# Altium PCB PCB1.PcbDoc
Units mm, origin at the board's own origin, x right, y up, seen from the top; angles counter-clockwise.
Board outline 35.94 x 49.66 mm, 2 copper layers (Top Layer, Bottom Layer); 28 components, 16 nets, 79 pads, 7 vias.
Unrouted connection lines stored in the file: 1.
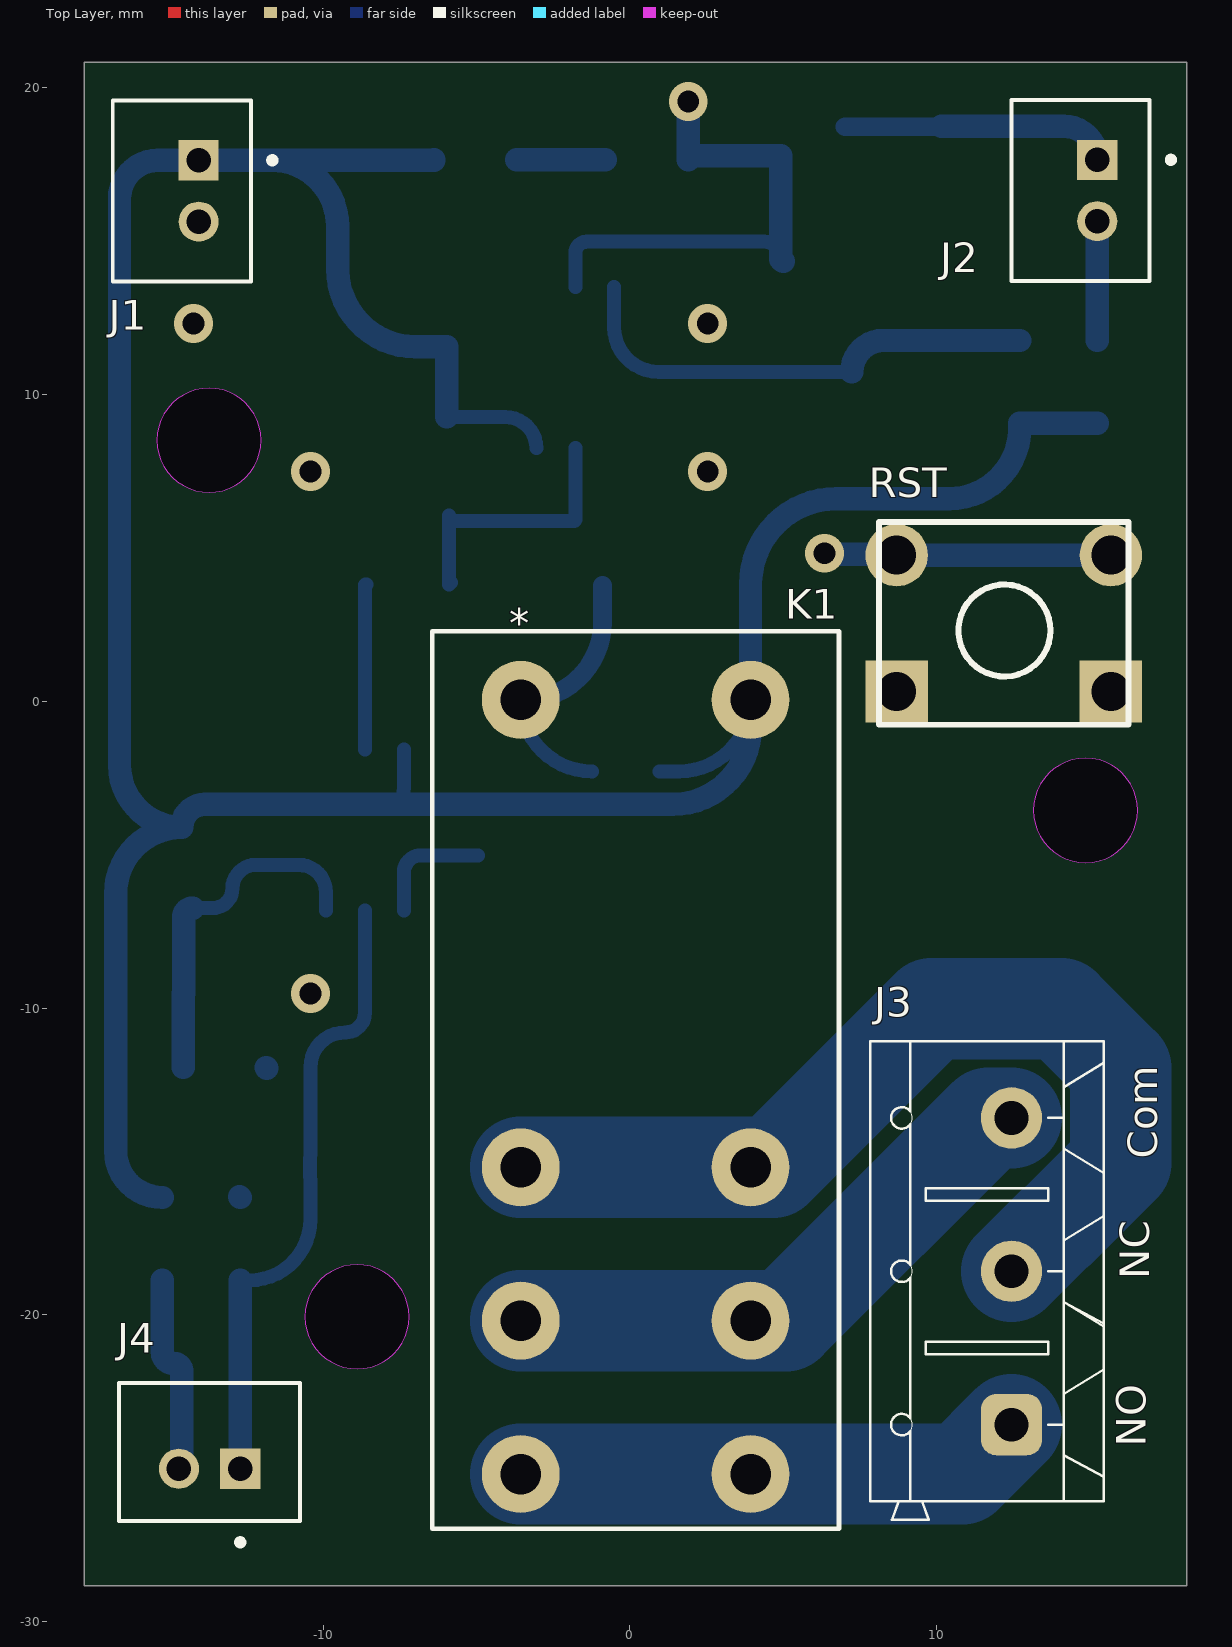
[diagram p0: Top Layer view]
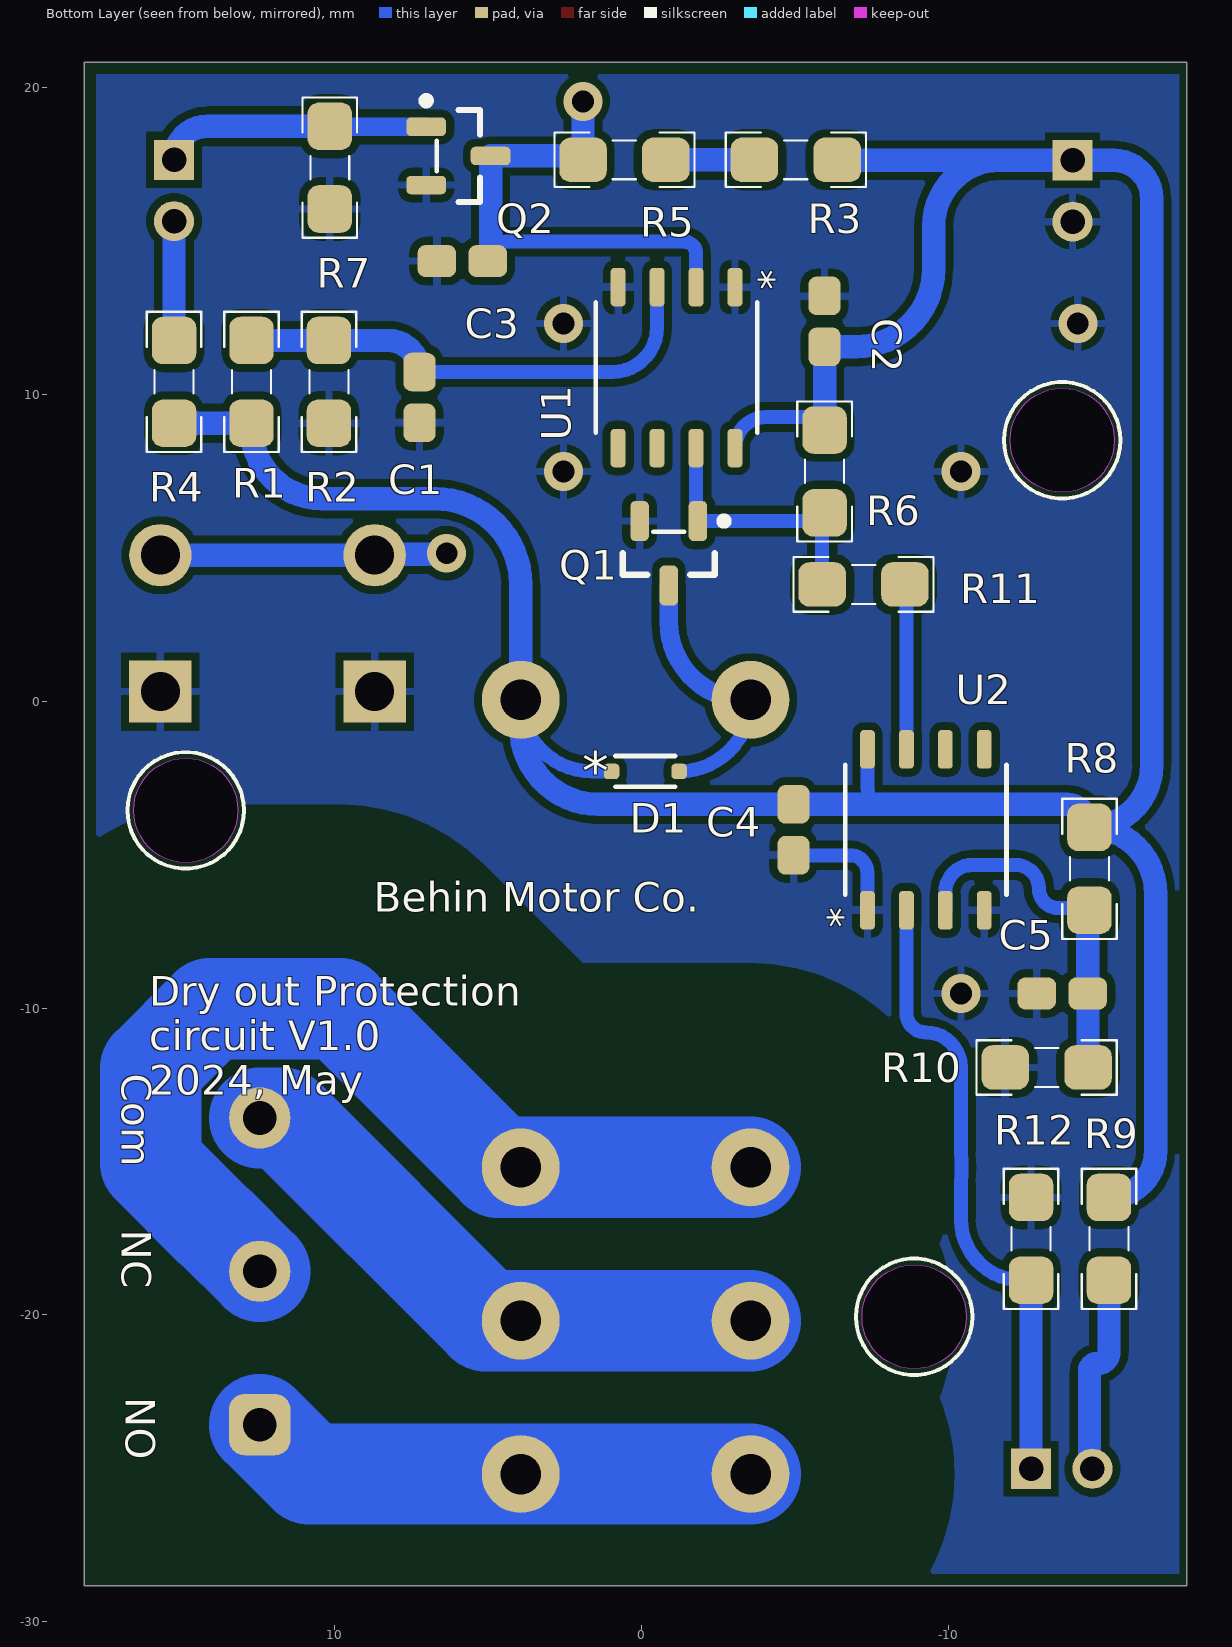
[diagram p1: Bottom Layer view, seen from below]

## Layer stack, top to bottom
Top Solder: solder mask 0.0102, Solder Resist, Dk 3.5
Top Layer: signal copper 0.0356
Dielectric 1: dielectric 0.32, FR-4, Dk 4.8
Bottom Layer: signal copper 0.0356
Bottom Solder: solder mask 0.0102, Solder Resist, Dk 3.5

## Board outline
-17.78,-28.829 -17.78,20.828 18.161,20.828 18.161,-28.829
cut-out: -10.59,-20.066 ccw(c-8.89,-20.066) -8.89,-21.766 ccw(c-8.89,-20.066) -7.19,-20.066 ccw(c-8.89,-20.066) -8.89,-18.366 ccw(c-8.89,-20.066)
cut-out: 13.159,-3.556 ccw(c14.859,-3.556) 14.859,-5.256 ccw(c14.859,-3.556) 16.559,-3.556 ccw(c14.859,-3.556) 14.859,-1.856 ccw(c14.859,-3.556)
cut-out: -15.416,8.509 ccw(c-13.716,8.509) -13.716,6.809 ccw(c-13.716,8.509) -12.016,8.509 ccw(c-13.716,8.509) -13.716,10.209 ccw(c-13.716,8.509)

## Design rules (kind name [scope] priority, off if disabled: settings)
Clearance Pwr_Signal [InNetClass('Power') vs InNetClass('Signal')] p1: gap=5 ignorepadtopadclearanceinfootprint=TRUE
Clearance [All] p2: gap=0.254 ignorepadtopadclearanceinfootprint=FALSE except(0: Arc-Hole Track-Hole SMDPad-Hole THPad-Hole Via-Hole Fill-Hole Poly-Hole Region-Hole Text-Hole)
Height [All] p1: minheight=0 maxheight=40 prefheight=12.7
MinimumSolderMaskSliver [All] p1: minsoldermaskwidth=0
PolygonConnect [All] p1: connectstyle=Relief reliefconductorwidth=0.254 reliefentries=4 polygonreliefangle="90 Angle" airgapwidth=0.254
RoutingVias [All] p1: holewidth=0.711 width=1.27 viastyle="Through Hole" minholewidth=0.711 minwidth=1.27 maxholewidth=0.711 maxwidth=1.27
SilkToSilkClearance [All] p1: silktosilkclearance=0
SilkToSolderMaskClearance [IsPad] p1: minsilkscreentomaskgap=0 clearancetoexposedcopper=TRUE
SolderMaskExpansion [All] p1: expansion=0.102 istentingtop=FALSE
Width [All] p1: maxlimit=5.08 minlimit=0.254 preferedwidth=0.406
26 further rules are at their usual default settings.

## Classes and differential pairs
net class Signal: GND NetC3_2 NetD1_2 NetJ2_1 NetJ2_2 NetJ4_1 NetJ4_2 NetQ1_1 NetR3_2 NetR11_1 NetU1_5 NetU1_6 NetU2_5 NetU2_6 Temp_Threshold Threshold VCC
net class Power: NetJ3_1 NetJ3_2 NetJ3_3

## Components (designator, comment, footprint, x,y, rotation, side; value= is the part's Value field where it differs from the comment)
C1 "100n" CAPC180100_90N_KEM-M 7.239,9.906 r90 bottom
C2 "100n" CAPC180100_90N_KEM-M -5.969,12.386 r270 bottom
C3 "10u" CAPC180100_90N_KEM-M 5.842,14.351 r180 bottom
C4 "100n" CAPC180100_90N_KEM-M -4.953,-4.191 r90 bottom
C5 "100n" CAPC180100_90N_KEM-M -13.715,-9.525 r180 bottom
D1 "1N4148WSF-7" SOD323F_DIO-L -0.127,-2.286 r180 bottom
J1 "B2B-PH-K-S(LF)(SN)" JST_B2B-PH-K-S(LF)(SN) -14.605,16.637 r90 top
J2 "B2B-PH-K-S(LF)(SN)" JST_B2B-PH-K-S(LF)(SN) 14.69,16.653 r90 top
J3 "2Pin Terminal" "KF301 2PIN" 12.446,-21.082 r90 top
J4 "B2B-PH-K-S(LF)(SN)" JST_B2B-PH-K-S(LF)(SN) -13.7,-24.469 r0 top
K1 "G2R-1-E 24DC" RELAY_G2R-1-E_OMR -3.556,0.047 r0 top
Q1 "BC846" SOT23_N -0.889,4.826 r270 bottom
Q2 "BC846" SOT23_N 5.969,17.78 r180 bottom
R1 "10k" RESC3413X04N 12.714,10.414 r270 bottom
R2 "20k" RESC3413X04N 10.189,10.414 r90 bottom
R3 "2.2Meg" RESC3413X04N -5.033,17.653 r0 bottom
R4 "1k" RESC3413X04N 15.24,10.414 r270 bottom
R5 "2.2Meg" RESC3413X04N 0.555,17.653 r0 bottom
R6 "1k" RESC3413X04N -5.969,7.493 r90 bottom
R7 "1Meg" RESC3413X04N 10.16,17.399 r270 bottom
R8 "10k" RESC3413X04N -14.605,-5.461 r90 bottom
R9 "8.2k" RESC3413X04N -15.24,-17.526 r90 bottom
R10 "10k" RESC3413X04N -13.208,-11.938 r180 bottom
R11 "0" RESC3413X04N -7.239,3.81 r0 bottom
R12 "10k" RESC3413X04N -12.7,-17.526 r270 bottom
RST "Zero" "Switch - Push to On" 12.192,2.54 r180 top
U1 "LM311PSR" SO-8_STM-L -1.143,10.878 r270 bottom
U2 "LM311PSR" SO-8_STM-L -9.271,-4.191 r90 bottom

## Footprints (in the part's own frame and the unit in brackets; to place one, negate y for a bottom-side part, rotate by r counter-clockwise, add the part's x,y. Pads: shape width x height; smd on the part's side, far side on the other; paste and mask are expansions set on the pad)
CAPC180100_90N_KEM-M [mm]
  rrect50% 1.259x1.051 smd paste+0: 1(-0.829,0) 2(0.829,0)
  body extent -0.9,-0.5 0.9,0.5, height 0.9
JST_B2B-PH-K-S(LF)(SN) [mm]
  rect 1.308x1.308 hole 0.8: 1(1,-0.55)
  round 1.308 hole 0.8: 2(-1,-0.55)
  silkscreen extent -2.95,-3.05 2.95,2.25, body extent -2.95,-2.25 2.95,2.25, height 6
"KF301 2PIN" [mm] "Designer Abbas Basereh"
  rrect50% 2x2 hole 1.1: 1(-2.5,0)
  round 2 hole 1.1: 2(2.5,0) 3(7.5,0)
  silkscreen extent -5.6,-3 10,4.6, body extent -5.6,-3 10,4.6, height 10
RELAY_G2R-1-E_OMR [mil]
  round 100 hole 52 paste-36: 1(0,0) 2(0,-600) 3(0,-796.85) 4(0,-993.7) 5(295,-993.7) 6(295,-796.85) 7(295,-600) 8(295,0)
  silkscreen extent -114,-1064 408,88, body extent -109,-1059 404,83, height 1004
RESC3413X04N [mm] "Chip Resistor, 2-Leads, Body 3/40x1/30mm, IPC Medium Density-Design:Abbas Basereh"
  rrect50% 1.55x1.45 smd: 1(-1.35,0) 2(1.35,0)
  silkscreen extent -2.29,-0.89 2.29,0.89, body extent -1.25,-0.62 1.25,0.62, height 0.79
SO-8_STM-L [mil]
  rrect50% 49.5x19 smd paste+0 mask+0: 1(-103.25,75) 2(-103.25,25) 3(-103.25,-25) 4(-103.25,-75) 5(103.25,-75) 6(103.25,-25) 7(103.25,25) 8(103.25,75)
  silkscreen extent -84,-104 84,104, body extent -122,-99 122,99, height 69
SOD323F_DIO-L [mm]
  rrect50% 0.502x0.502 smd paste+0 mask+0: 1(-1.101,0) 2(1.101,0)
  silkscreen extent -0.98,-0.5 0.98,0.5, body extent -1.25,-0.38 1.25,0.38, height 0.82
SOT23_N [mm] "SOT23, 3-Leads, Body 2.9x1.3mm, Pitch 0.95mm, Lead Span 2.3mm, IPC Medium Density"
  rrect50% 1.3x0.6 smd: 1(-1.05,0.95) 2(-1.05,-0.95) 3(1.05,0)
  silkscreen extent -1.17,-1.5 0.7,1.92, body extent -1.27,-1.5 1.27,1.5, height 1.1
"Switch - Push to On" [mil]
  rect 80x80 hole 50: 1(-137.5,87.5) 1(137.5,87.5)
  round 80 hole 50: 2(-137.5,-87.5) 2(137.5,-87.5)
  silkscreen extent -160,-130 160,130, body extent -155,-121 157,123, height 205

## Part data
C1 C2 C4 C5: library part C0603C106M7PACTU, "Cap, 100nF, 50v, 0603", Mfr_Name=Kemet, ComponentLink1Description=ickala, ComponentLink1URL=https://ickala.com/cap-smd-0603/11911-c100nf50vs0603.html
C3: library part C0603C106M7PACTU, "Cap 10uF, 50v, 0603", Mfr_Name=Kemet, ComponentLink1Description=ickala, ComponentLink1URL=https://ickala.com/cap-smd-0603/17293-c10uf50vs0603.html
D1: "No Description Available", Mfr_Name="Diodes Inc", ComponentLink1Description=ickala, ComponentLink1URL=https://ickala.com/standard-diode/39398-1n4148ws.html
J1 J2 J4: "Connector Header Through Hole 2 position 0.079 (2.00mm)", Package=None, Check_prices=https://www.snapeda.com/parts/B2B-PH-K-S%20(LF)(SN)/JST/view-part/?ref=eda, MF=JST, MP="B2B-PH-K-S (LF)(SN)", SnapEDA_Link=https://www.snapeda.com/parts/B2B-PH-K-S%20(LF)(SN)/JST/view-part/?ref=snap
J3: library part "3Pin Terminal", "Terminal", ComponentLink1Description=ickala, ComponentLink1URL=https://ickala.com/pluggable-terminal/44373-%D8%AA%D8%B1%D9%85%DB%8C%D9%86%D8%A7%D9%84-2-%D9%BE%DB%8C%DA%86.html
K1: "No Description Available", Mfr_Name=Omron, ComponentLink1Description=ickala, ComponentLink1URL=https://ickala.com/5v-relay/43074-g2r-1-e-5vdc.html, RefDes=RefDes, Type=Type
Q1 Q2: "NPN General-purpose Transistor", ComponentLink1Description=Javan, ComponentLink1URL=https://www.javanelec.com/Shops?productCategory=884#dtl/7151, ComponentLink2Description=Paya, ComponentLink2URL=available, ComponentLink3Description=ickala, ComponentLink3URL=https://ickala.com/bjt-parts/12141-bc846b.html?search_query=BC846&results=1, PackageReference=SOT23
R1 R8 R10 R12: library part "RES 0805 0.125W", "Res 10k, 5%,  0805", ComponentLink1Description=ickala, ComponentLink1URL=https://ickala.com/r0805-5/12395-r10k-0805-5.html, Desc.="RES SMD 0805"
R2: library part "RES 0805 0.125W", "Res 20k, 5%, 0805", ComponentLink1Description=ickala, ComponentLink1URL=https://ickala.com/r0805-5/14277-r20k-0805-5.html, Desc.="RES SMD 0805"
R3 R4 R5 R6 R11: library part "RES 0805 0.125W", "RES 0805", Desc.="RES SMD 0805"
  R3 R5: ComponentLink1Description="ic kala", ComponentLink1URL=https://ickala.com/r0805-5/14271-r22m-0805-5.html
  R4 R6: ComponentLink1Description=Javan, ComponentLink1URL=https://www.javanelec.com/Shops?searchFilter=BC856#dtl/3997
  R11: ComponentLink1Description=Javan
R7: library part "RES 0805 0.125W", "Res 1Meg, 5%, 0805", ComponentLink1Description=ickala, ComponentLink1URL=https://ickala.com/r0805-5/14268-r1m-0805-5.html, Desc.="RES SMD 0805"
R9: library part "RES 0805 0.125W", "Res 8.2k, 5%,  0805", ComponentLink1Description=ickala, ComponentLink1URL=https://ickala.com/r0805-5/14349-r82k-0805-5.html, Desc.="RES SMD 0805"
RST: library part "Switch PB", "Push Button Switch"
U1 U2: "No Description Available", Mfr_Name="Texas Instruments", ComponentLink1Description="ic kala", ComponentLink1URL=https://ickala.com/ic-comarators/24740-lm311dr.html, RefDes=RefDes, Type=Type

## Via types
v1: diameter 1.27, hole 0.711, Top Layer to Bottom Layer, 7 vias

## Nets (pads, with @x,y where several pads share a name; then routed paths per layer and width w, separated by ;. In a path a pad name is that pad's centre, name@x,y a point inside that pad or via, vN(x,y) a via of type N, cw(c..) or ccw(c..) an arc to the next point about the centre after c; other vN are vias at no path point)
GND: C1.1 C2.1 C3.1 C4.1 C5.1 J1.2 Q1.2 Q2.2 R2.1 R7.2 R10.1 R12.1 RST.1 U1.1 U1.4 U2.1 U2.4 | length 4
  Bottom Layer w0.457: U2.1 -7.366,-5.588 cw(c-6.798,-5.588) -6.798,-5.02 C4.1
  Bottom Layer w0.762: R12.1@-12.724,-16.153 R12.1 ; R10.1 R10.1@-11.835,-11.962
  other v1: -10.414,-9.525 -10.414,7.493 2.54,7.493 -14.224,12.319 2.54,12.319
NetC3_2: C3.2 Q2.3 R5.2 RST.2 U1.2 | length 26.3
  Bottom Layer w0.457: U1.2 -1.778,14.605 cw(c-1.397,14.605) -1.397,14.986 4.378,14.986 cw(c4.378,14.351) C3.2@4.919,14.683
  Bottom Layer w0.762: v1(1.905,19.558) R5.2 cw(c2.032,17.653) 2.032,17.78 Q2.3 4.919,14.683 4.919,14.445 ccw(c5.013,14.445) C3.2 ; v1(6.35,4.826) 6.382,4.794 9.366,4.794 9.398,4.826 cw(c9.398,4.763) 9.461,4.763 RST.2@15.938,4.763
NetD1_2: D1.2 K1.1 Q1.3 | length 9
  Bottom Layer w0.457: K1.1 -3.556,0.042 ccw(c-1.228,0.042) D1.2
  Bottom Layer w0.61: K1.1 -3.429,0.047 ccw(c-3.429,2.587) -0.889,2.587 Q1.3
NetJ2_1: J2.1 Q2.1 R7.1 | length 8.9
  Bottom Layer w0.61: Q2.1 10.141,18.73 ccw(c10.141,18.749) R7.1
  Bottom Layer w0.762: R7.1 14.144,18.749 cw(c14.144,17.653) J2.1
NetJ2_2: J2.2 R4.1 | length 3.9
  Bottom Layer w0.762: R4.1 J2.2
NetJ3_1: J3.1 K1.4 K1.5 | length 16.7
  Bottom Layer w3.302: K1.4 10.835,-25.193 J3.1
NetJ3_2: J3.2 K1.2 K1.7 | length 30.6
  Bottom Layer w3.302: K1.2 K1.7 4.67,-15.193 9.837,-10.026 14.068,-10.026 16.002,-11.96 16.002,-15.055 13.919,-17.138 13.89,-17.138 J3.2
NetJ3_3: J3.3 K1.3 K1.6 | length 18.7
  Bottom Layer w3.302: K1.3 5.08,-20.193 11.691,-13.582 J3.3
NetJ4_1: J4.1 R12.2 U2.2 | length 20.7
  Bottom Layer w0.457: R12.2 -12.399,-18.876 ccw(c-12.399,-16.891) -10.414,-16.891 -10.414,-15.754 ccw(c-10.871,-15.756) -10.415,-15.722 ; -10.415,-15.722 cw(c-3.556,-15.193) -10.415,-14.664 ccw(c-10.871,-14.63) -10.414,-14.632 -10.414,-11.938 cw(c-9.271,-11.938) -9.271,-10.795 ccw(c-9.271,-10.16) -8.636,-10.16 U2.2
  Bottom Layer w0.762: J4.1 R12.2
NetJ4_2: J4.2 R9.1 | length 6.6
  Bottom Layer w0.762: R9.1 -15.24,-21.209 ccw(c-14.859,-21.209) -14.859,-21.59 cw(c-14.859,-21.844) -14.605,-21.844 -14.605,-24.924 cw(c-14.7,-24.924) J4.2
NetQ1_1: Q1.1 R6.1 R11.2 U1.7 | length 8.9
  Bottom Layer w0.457: R11.2@-5.823,3.876 ccw(c-5.823,3.81) R11.2 -5.889,6.063 ccw(c-5.702,6.063) -5.702,5.876 Q1.1 ccw(c-1.839,5.937) -1.778,5.937 U1.7
NetR3_2: R3.2 R5.1 | length 2.9
  Bottom Layer w0.762: R3.2 R5.1
NetR11_1: R11.1 U2.7 | length 5.4
  Bottom Layer w0.457: U2.7 -8.636,3.763 cw(c-8.589,3.763) R11.1
Temp_Threshold: C5.2 R8.1 R10.2 U2.3 | length 11.6
  Bottom Layer w0.457: R8.1@-14.242,-6.744 -13.602,-6.744 ccw(c-13.602,-6.096) -12.954,-6.096 cw(c-12.192,-6.096) -12.192,-5.334 -10.795,-5.334 cw(c-10.795,-6.223) -9.906,-6.223 U2.3
  Bottom Layer w0.762: R10.2 -14.558,-9.525 C5.2 -14.544,-7.046 cw(c-14.242,-7.046) -14.35,-6.764 cw(c-14.242,-7.046) R8.1@-14.242,-6.744
Threshold: C1.2 R1.1 R2.2 U1.3 | length 15.9
  Bottom Layer w0.457: U1.3 -0.508,12.192 ccw(c0.949,12.192) 0.949,10.735 C1.2
  Bottom Layer w0.762: C1.2 cw(c8.268,10.735) 8.268,11.764 R2.2 R1.1
VCC: C2.2 C4.2 D1.1 J1.1 K1.8 R1.2 R3.1 R4.2 R6.2 R8.2 R9.2 U1.8 U2.8 | length 107.9
  Bottom Layer w0.457: -7.495,-3.362 ccw(c-8.683,-2.794) -7.366,-2.794 U2.8 ; R6.2@-5.969,9.271 -4.064,9.271 cw(c-4.064,8.255) U1.8 ; D1.1 1.604,-2.286 ccw(c1.604,0.047) K1.8
  Bottom Layer w0.762: R9.2 cw(c-15.24,-14.652) -16.764,-14.652 -16.764,-6.27 cw(c-14.605,-6.27) R8.2 ; R3.1 -6.383,17.637 -11.668,17.637 ; R6.2@-5.969,9.271 C2.2 -6.985,11.557 cw(c-6.985,14.097) -9.525,14.097 -9.525,15.494 ccw(c-11.668,15.494) -11.668,17.637 ; R1.2@12.708,9.064 cw(c10.412,8.906) 10.412,6.604 6.731,6.604 ccw(c6.731,3.81) 3.937,3.81 K1.8 3.937,-0.822 cw(c1.397,-0.822) 1.397,-3.362 C4.2 -7.495,-3.362 -13.856,-3.362 ccw(c-13.856,-4.111) R8.2 ; R1.2 R4.2 ; R8.2 cw(c-14.605,-2.079) -16.637,-2.079 -16.637,16.383 cw(c-15.383,16.383) -15.383,17.637 J1.1 -11.668,17.637
pads on no net: U1.5 U1.6 U2.5 U2.6

## Polygon pours and split planes (outlines as drawn)
GND on Bottom Layer "GND_L02_P000" (solid, pour order 0): -17.526,-28.448 -17.526,20.447 17.78,20.447 17.78,-28.448

## Other copper
Bottom Layer:
  pour cut-out: -10.79,-20.066 ccw(c-8.89,-20.066) -8.89,-21.966 ccw(c-8.89,-20.066) -6.99,-20.066 ccw(c-8.89,-20.066) -8.89,-18.166 ccw(c-8.89,-20.066)
  pour cut-out: 12.959,-3.556 ccw(c14.859,-3.556) 14.859,-5.456 ccw(c14.859,-3.556) 16.759,-3.556 ccw(c14.859,-3.556) 14.859,-1.656 ccw(c14.859,-3.556)
  pour cut-out: -15.616,8.509 ccw(c-13.716,8.509) -13.716,6.609 ccw(c-13.716,8.509) -11.816,8.509 ccw(c-13.716,8.509) -13.716,10.409 ccw(c-13.716,8.509)

## Silkscreen, mask and mechanical layers (free items; w line width, h text height)
Top Overlay:
  text "Com" at 17.196,-14.91 h0.97 r90
  text "NC" at 16.942,-18.847 h0.97 r90
  text "NO" at 16.815,-24.308 h0.97 r90
Bottom Overlay:
  circle w0.127: c-8.89,-20.066 r1.9
  circle w0.127: c14.859,-3.556 r1.9
  circle w0.127: c-13.716,8.509 r1.9
  text "Behin Motor Co." at 8.725,-6.858 h0.97
  text "Com" at 16.942,-12.141 h0.97 r90
  text "Dry out Protection  / circuit V1.0 / 2024, May" at 16.052,-12.827 h0.97
  text "NC" at 16.942,-17.221 h0.97 r90
  text "NO" at 16.815,-22.682 h0.97 r90
Mechanical 1:
  the board outline again, w0.127

## Dimensions
18.161,-28.829 to -17.78,-28.829 on Mechanical 1
18.161,20.828 to 18.161,-28.829 on Mechanical 1

## Text inside footprints (layer, text, board x,y; h text height)
D1: Mechanical 13 "*" at 0.787,-2.921 h1.27; Bottom Overlay "*" at 1.923,-2.921 h1.27
K1: Mechanical 13 "*" at -3.873,2.11 h0.97; Top Overlay "*" at -3.937,2.079 h0.97
U1: Mechanical 13 "*" at -2.299,12.808 h0.97 r90; Bottom Overlay "*" at -3.404,14.072 h0.97 r90
U2: Mechanical 13 "*" at -8.115,-6.121 h0.97 r270; Bottom Overlay "*" at -7.01,-7.385 h0.97 r270